# Altium PCB l1.PcbDoc
Units mm, origin at the board's own origin, x right, y up, seen from the top; angles counter-clockwise.
Board outline 39 x 12 mm, 2 copper layers (Top Layer, Bottom Layer); 10 components, 13 nets, 54 pads, 28 vias.
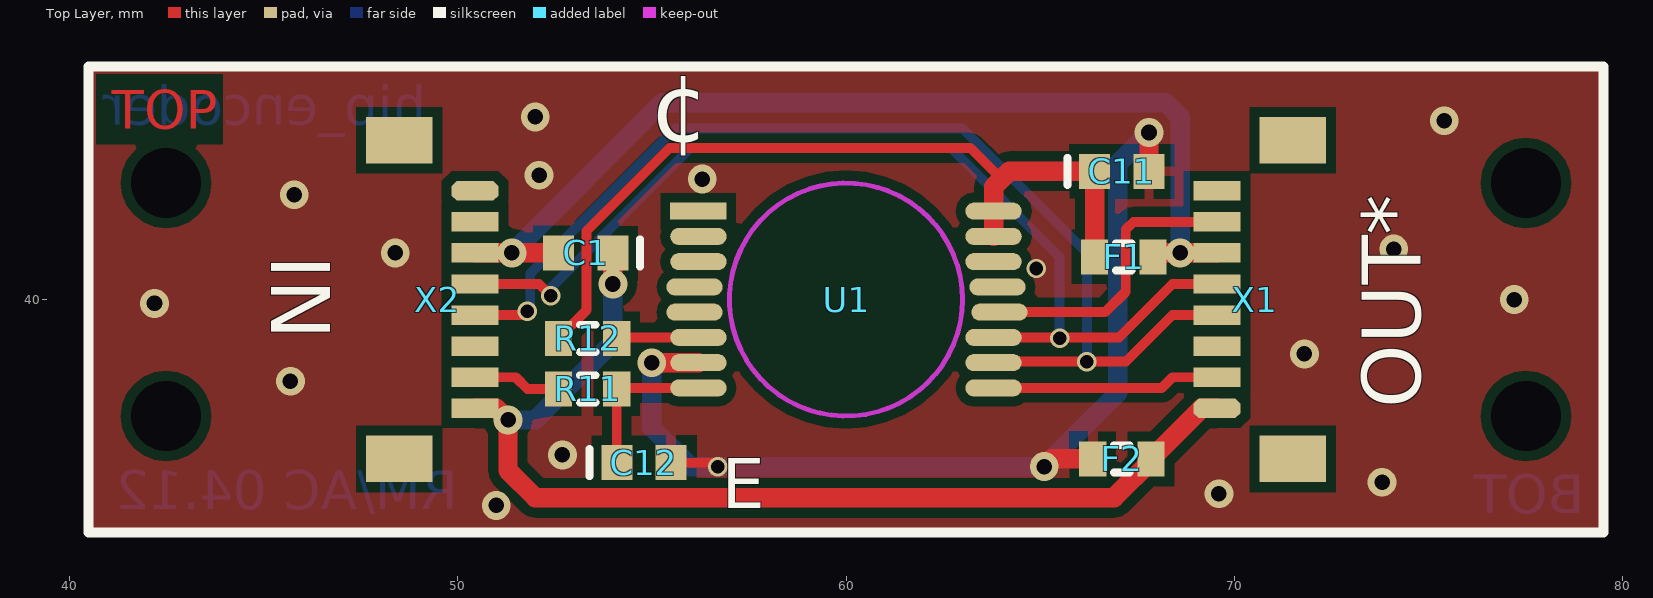
[diagram p0: Top Layer view]
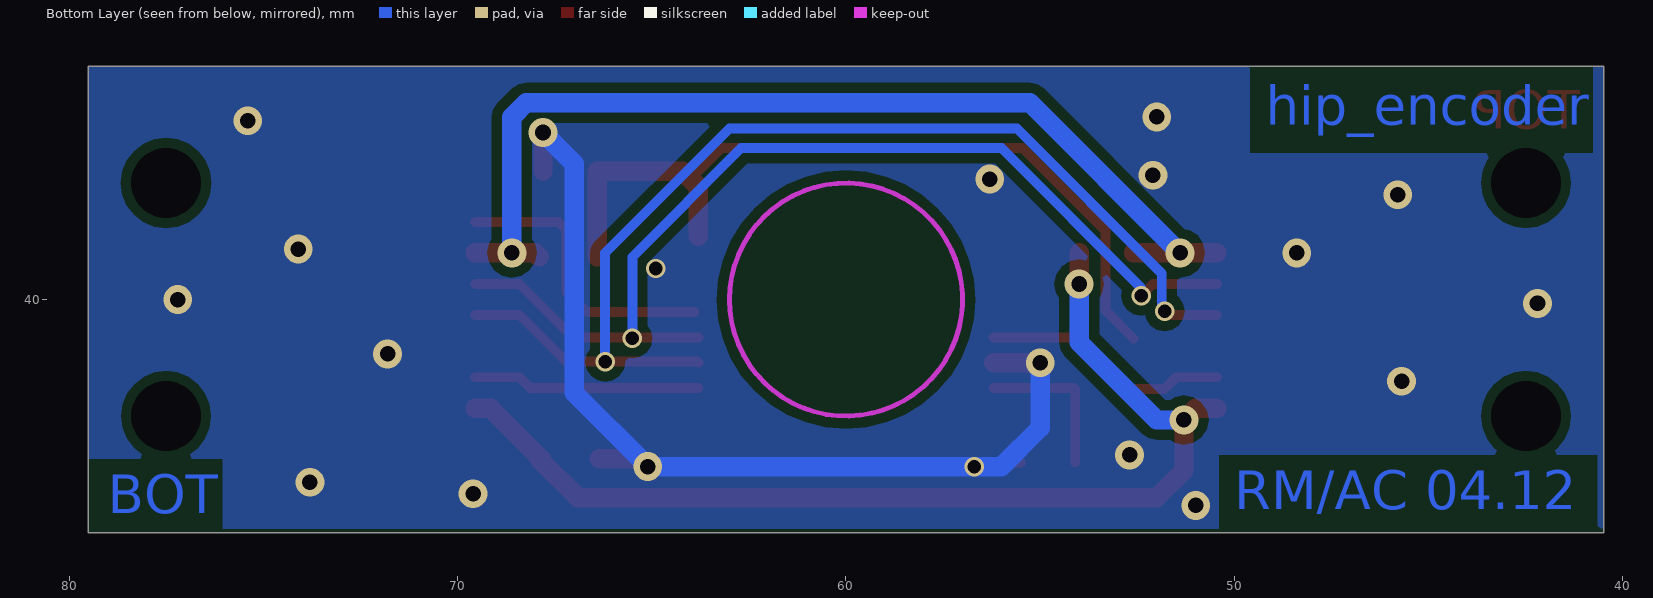
[diagram p1: Bottom Layer view, seen from below]

## Layer stack, top to bottom
Top Solder: solder mask 0.0102, Solder Resist, Dk 3.5
Top Layer: signal copper 0.0356
Dielectric1: dielectric 0.32, FR-4, Dk 4.8
Bottom Layer: signal copper 0.0356
Bottom Solder: solder mask 0.0102, Solder Resist, Dk 3.5

## Board outline
40.5,46 79.5,46 79.5,34 40.5,34

## Design rules (kind name [scope] priority, off if disabled: settings)
Clearance Clearance_Polygons [InPolygon] p1: gap=0.254
Clearance [All] p2: gap=0.15
HoleSize [All] p1: absolutevalues=TRUE maxlimit=6.2 minlimit=0.35 maxpercent=80.000 minpercent=20.000
MinimumSolderMaskSliver [All] p1: minsoldermaskwidth=0.15
PolygonConnect PolygonConnect_via [All vs IsVia] p1: connectstyle=Direct reliefconductorwidth=0.254 reliefentries=4 polygonreliefangle="90 Angle" airgapwidth=0.254
PolygonConnect [All] p2: connectstyle=Relief reliefconductorwidth=0.254 reliefentries=4 polygonreliefangle="90 Angle" airgapwidth=0.254
RoutingVias [All] p1: holewidth=0.5 width=0.8 viastyle="Through Hole" minholewidth=0.35 minwidth=0.5 maxholewidth=1.5 maxwidth=2
SilkToSilkClearance [All] p1 off: silktosilkclearance=0.254
SilkToSolderMaskClearance SilkscreenOverComponentPads [IsPad] p1 off: minsilkscreentomaskgap=0.254 clearancetoexposedcopper=TRUE
SolderMaskExpansion [All] p1: expansion=0
Width [All] p1: maxlimit=5 minlimit=0.15 preferedwidth=0.5
25 further rules are at their usual default settings.

## Components (designator, comment, footprint, x,y, rotation, side; value= is the part's Value field where it differs from the comment)
C1 "10uF" CAPC1608L 53.3,41.2 r180 top
C11 "100nF" CAPC1608L 67.1,43.3 r0 top
C12 "1nF" CAPC1608L 54.8,35.8 r0 top
F1 "50mA, 1.5R" RESC1608L 67.15,41.1 r180 top
F2 "50mA, 1.5R" RESC1608L 67.1,35.9 r180 top
R11 "100R" RESC1608L 53.35,37.7 r0 top
R12 "xR" RESC1608L 53.35,39 r0 top
U1 "AS5045" SSOP16 60,40 r0 top
X1 "SM08B-SURS" SM08B-SURS 69.55,40 r180 top
X2 "SM08B-SURS" SM08B-SURS 50.45,40 r0 top

## Footprints (in the part's own frame and the unit in brackets; to place one, negate y for a bottom-side part, rotate by r counter-clockwise, add the part's x,y. Pads: shape width x height; smd on the part's side, far side on the other; paste and mask are expansions set on the pad)
CAPC1608L [mm] "Chip Capacitor, Body 1.6x0.8mm, IPC High Density"
  rect 0.8x0.9 smd: 1(-0.7,0) 2(0.7,0)
  silkscreen extent -1.4,-0.35 -1.4,0.35, body extent -0.87,-0.48 0.87,0.48, height 0.85
RESC1608L [mm] "Chip Resistor, Body 1.6x0.8mm, IPC High Density"
  rect 0.7x0.9 smd: 1(-0.75,0) 2(0.75,0)
  silkscreen extent -0.2,-0.35 0.2,0.35, body extent -0.85,-0.48 0.85,0.48, height 0.6
SM08B-SURS [mm] "Wire-to-board connector, 8 pins, Body 8.6x2.7mm, Pitch 0.8mm, IPC Low Density"
  oct 1.2x0.5 smd: 1(0,2.8)
  rect 1.2x0.5 smd: 2(0,2) 3(0,1.2) 4(0,0.4) 5(0,-0.4) 6(0,-1.2) 7(0,-2) 8(0,-2.8)
  rect 1.7x1.2 smd: A(-1.95,4.1) B(-1.95,-4.1)
  body extent -2.45,-4.3 0.25,4.3, height 1.7
SSOP16 [mm] "16-Pin Shrink Small-Outline Package, Body 7.8x6.2mm, 0.65 mm Pitch, IPC Medium Density"
  rect 1.45x0.44 smd: 1(-3.8,2.275)
  oval 1.45x0.44 smd: 2(-3.8,1.625) 3(-3.8,0.975) 4(-3.9,0.325) 5(-3.9,-0.325) 6(-3.8,-0.975) 7(-3.8,-1.625) 8(-3.8,-2.275) 9(3.8,-2.275) 10(3.8,-1.625) 11(3.8,-0.975) 12(3.95,-0.325) 13(3.9,0.325) 14(3.8,0.975) 15(3.8,1.625) 16(3.8,2.275)
  body extent -2.8,-3.25 2.8,3.25, height 2

## Part data
C1 C11 C12: library part Cap, "Capacitor"
F1 F2: library part "Fuse 1", "Ferrit Bead"
R11 R12: library part Res1, "Resistor"
U1: "12 Bit Programmable Magnetic Rotary Encoder"
X1 X2: "wire-to-board connector"

## Free pads (board coordinates)
  round 0 hole 1.8: 0(42.5,37) 0(42.5,43) 0(77.5,37) 0(77.5,43)

## Via types
v1: diameter 0.74, hole 0.4, Top Layer to Bottom Layer, tented both sides, 22 vias
v2: diameter 0.5, hole 0.35, Top Layer to Bottom Layer, tented both sides, 6 vias

## Nets (pads, with @x,y where several pads share a name; then routed paths per layer and width w, separated by ;. In a path a pad name is that pad's centre, name@x,y a point inside that pad or via, vN(x,y) a via of type N, cw(c..) or ccw(c..) an arc to the next point about the centre after c; other vN are vias at no path point)
3.3V: C11.1 F1.2 R12.1 U1.15 U1.16 | length 21.2
  Top Layer w0.254: R12.1 53.327,39.727 ; 53.323,39.727 53.323,41.765 55.458,43.9 63.2,43.9 64,43.1
  Top Layer w0.5: U1.15 U1.16 63.8,42.9 64,43.1 64.2,43.3 C11.1 F1.2
C\S\: U1.11 X1.5 X2.4 | length 26.4
  Top Layer w0.254: X2.4 52.1,40.4 v2(52.4,40.1) ; U1.11 67.025,39.025 68.4,40.4 X1.5
  Bottom Layer w0.254: v2(52.4,40.1) 52.4,40.3 56,43.9 62.7,43.9 65.5,41.1 v2(65.5,39)
DI: R11.1 X2.7 | length 2.3
  Top Layer w0.254: X2.7 51.5,38 51.8,37.7 R11.1
DO: U1.9 X1.2 | length 5.9
  Top Layer w0.254: U1.9 63.802,37.727 68.127,37.727 68.4,38 X1.2
GND: C11.2 C12.2 F2.2 U1.7 | length 26.6
  Top Layer w0.254: C12.2 56.6,35.8 v2(56.7,35.7)
  Top Layer w0.5: v1(55,38.375) U1.7 ; v1(65.1,35.7) 65.3,35.9 F2.2 ; C11.2 v1(67.8,44.3)
  Bottom Layer w0.5: v1@55,38.3 55,36.7 56,35.7 v2(56.7,35.7) v1(65.1,35.7) 67,37.6 67,43.5 v1(67.8,44.3)
  other v1: 51,34.7 69.6,35 73.8,35.3 52.7,36 45.7,37.9 71.8,38.6 42.2,39.9 77.2,40 48.4,41.2 74.1,41.3 45.8,42.7 56.3,43.1 52.1,43.2 75.4,44.6 52,44.7
  other v2: 64.9,40.8
M\A\G\D\E\C\1\: U1.2
M\A\G\I\N\C\1\: U1.1
MODE1: R12.2 U1.6 | length 2.1
  Top Layer w0.254: R12.2 54.125,39.025 U1.6
PROG_DI1: C12.1 R11.2 U1.8 | length 4
  Top Layer w0.254: C12.1 R11.2 54.125,37.725 U1.8
PWM1: U1.12 X1.7 | length 7.6
  Top Layer w0.254: U1.12@63.9,39.675 66.675,39.675 67.2,40.2 67.2,41.8 67.4,42 X1.7
SCLK: U1.10 X1.4 X2.5 | length 28.6
  Top Layer w0.254: X2.5 51.7,39.6 v2(51.8,39.7) ; U1.10 63.829,38.404 67.204,38.404 68.4,39.6 X1.4
  Bottom Layer w0.254: v2(51.8,39.7) 51.873,39.773 51.873,40.673 55.6,44.4 63,44.4 66.2,41.2 v2(66.2,38.4)
VDD: C1.2 F1.1 X1.6 X2.3 | length 26.3
  Top Layer w0.5: X2.3 v1(51.4,41.2) C1.2 ; F1.1 68,41.2 X1.6
  Bottom Layer w0.5: v1(51.4,41.2) 55.27,45.07 68.23,45.07 68.6,44.7 v1(68.6,41.2)
VSS: C1.1 F2.1 X1.1 X2.8 | length 27.6
  Top Layer w0.5: X2.8 51,37.2 v1(51.3,36.9) 51.3,35.6 52,34.9 66.9,34.9 F2.1@67.9,35.9 ; v1@54,40.4 C1.1 ; F2.1 69.15,37.2 X1.1
  Bottom Layer w0.5: v1(51.3,36.9) 52,36.9 54,38.9 v1(54,40.4)
pads on no net: U1.3 U1.4 U1.5 U1.13 U1.14 X1.3 X1.8 X1.A X1.B X2.1 X2.2 X2.6 X2.A X2.B

## Polygon pours and split planes (outlines as drawn)
GND on Top Layer "TOPGND" (solid, remove dead copper, pour order 4): 40.5,46 40.5,34 40.662,34.1 79.5,34.1 79.5,46
GND on Bottom Layer "BOTGND" (solid, remove dead copper, pour order 3): 40.5,46 40.5,34 40.662,34.1 79.5,34.1 79.5,46

## Keep-outs
Keep-Out Layer:
  circle w0.127: c60,40 r3

## Other copper
Top Layer:
  text "TOP" at 41.1,44.4 h1
Bottom Layer:
  text "hip_encoder" at 49.2,44.5 h1
  text "RM/AC 04.12" at 50,34.6 h1
  text "BOT" at 79,34.5 h1

## Silkscreen, mask and mechanical layers (free items; w line width, h text height)
Top Overlay:
  the board outline again, w0.254
  text "¢" at 54.965,43.5 h3
  text "IN" at 45.2,41.143 h1.52 r270
  text "OUT*" at 74.8,37.207 h1.52 r90
  text "E" at 56.8,34.2 h2.2
Mechanical 1:
  circle w0.127: c60,40 r3.05
  lines w0.127: 40.5,34 40.5,46 79.5,46 79.5,34 40.5,34
Mechanical 3:
  circle w0.1: c42.5,43 r1.5
  circle w0.1: c77.5,43 r1.5
  circle w0.1: c77.5,37 r1.5
  circle w0.1: c42.5,37 r1.5

## Dimensions
40.5,46 to 79.5,46 on Mechanical 1
79.5,46 to 79.5,34 on Mechanical 1
40.5,34 to 42.5,37 on Mechanical 1
40.5,34 to 42.5,37 on Mechanical 1